# Altium PCB board.PcbDoc (part 1 of 2)
Units mm, origin at the board's own origin, x right, y up, seen from the top; angles counter-clockwise.
Board outline 123 x 60 mm, 4 copper layers (Top Layer, Mid Layer 1, Mid Layer 2, Bottom Layer), stack 1.17 mm thick; 104 components, 66 nets, 349 pads, 110 vias.
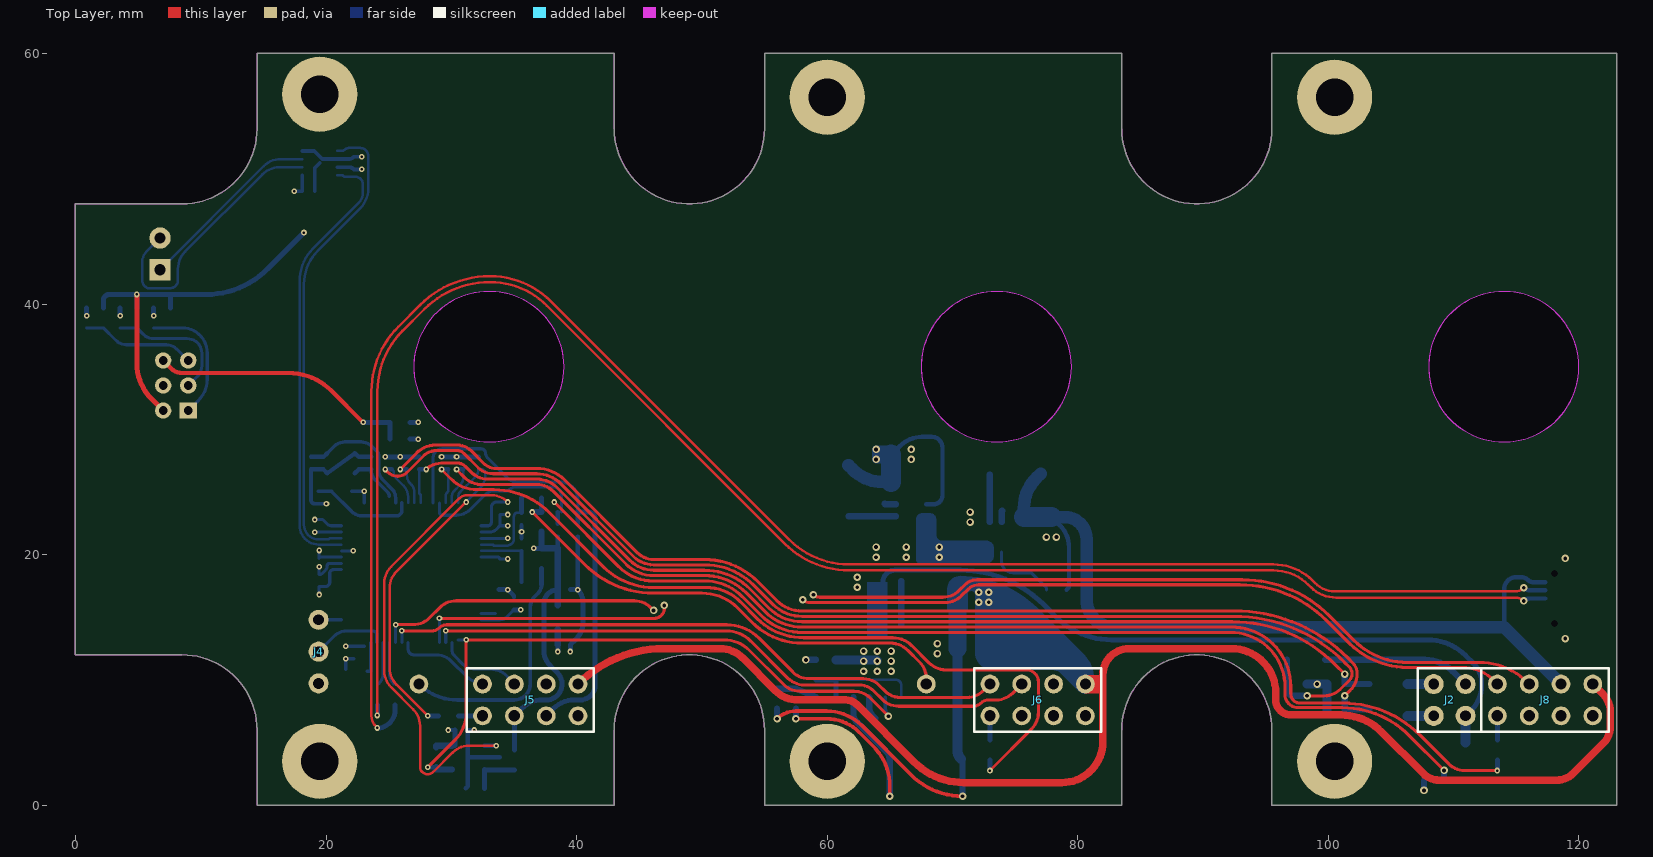
[diagram p0: Top Layer view]
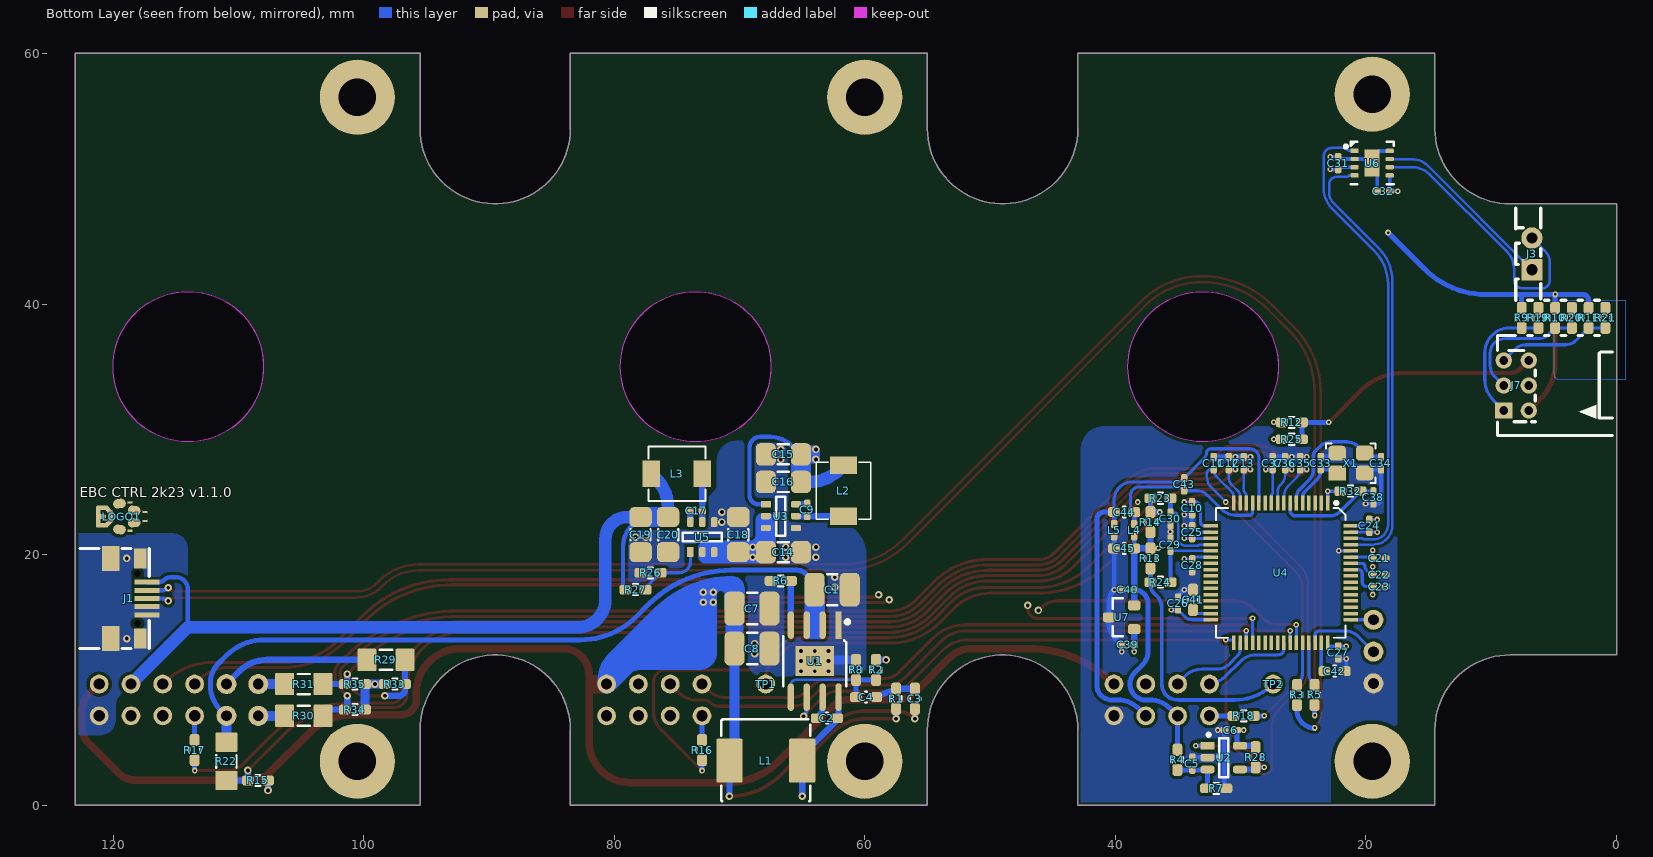
[diagram p1: Bottom Layer view, seen from below]
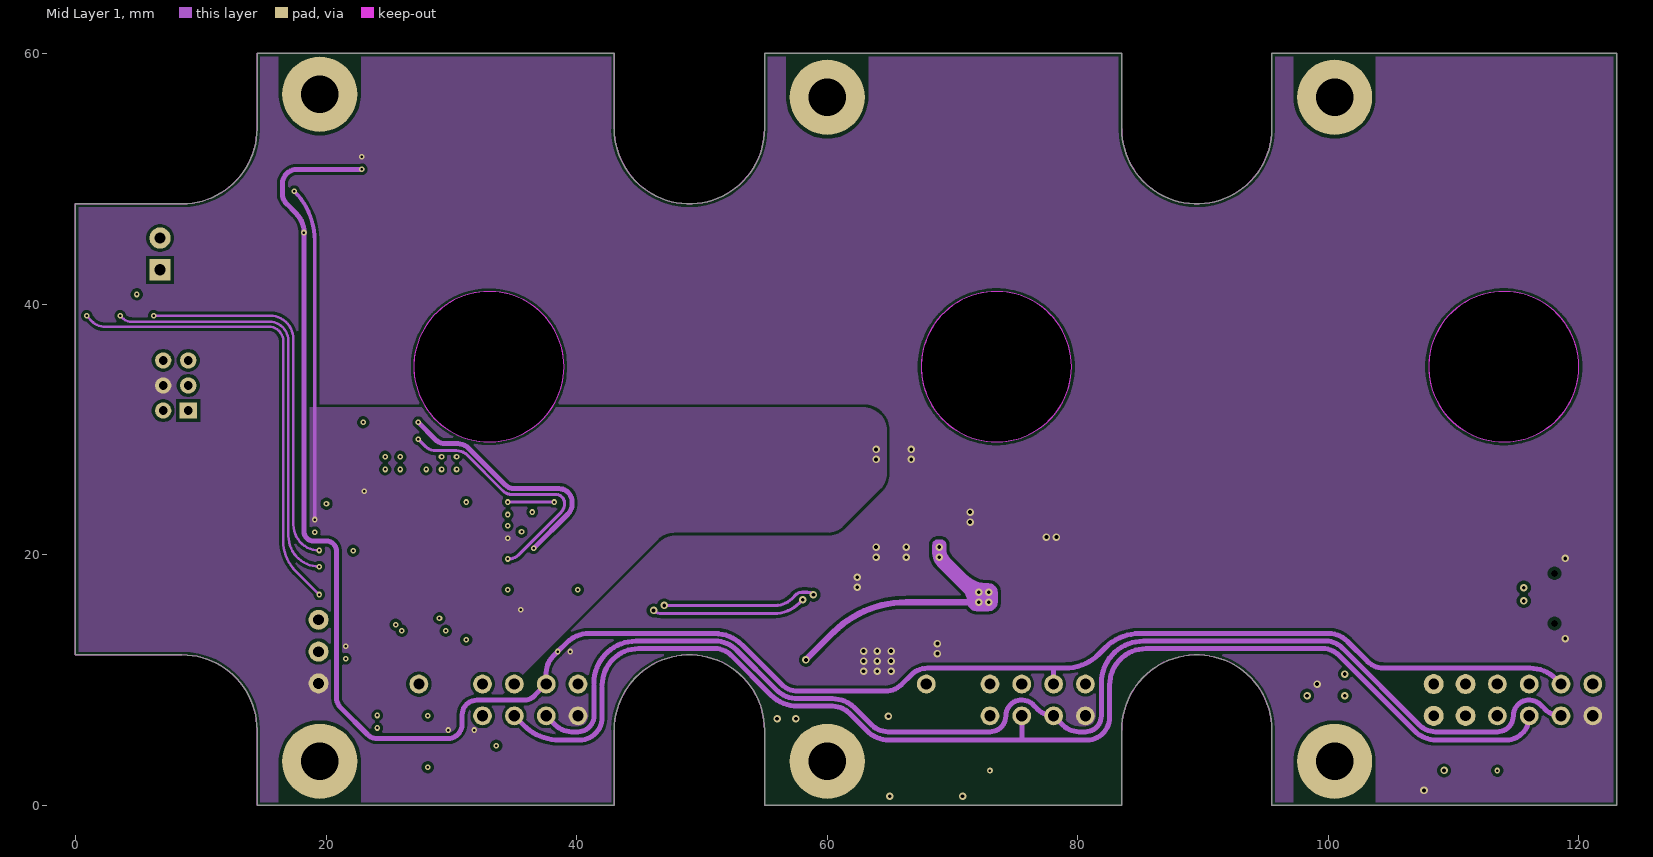
[diagram p2: Mid Layer 1]
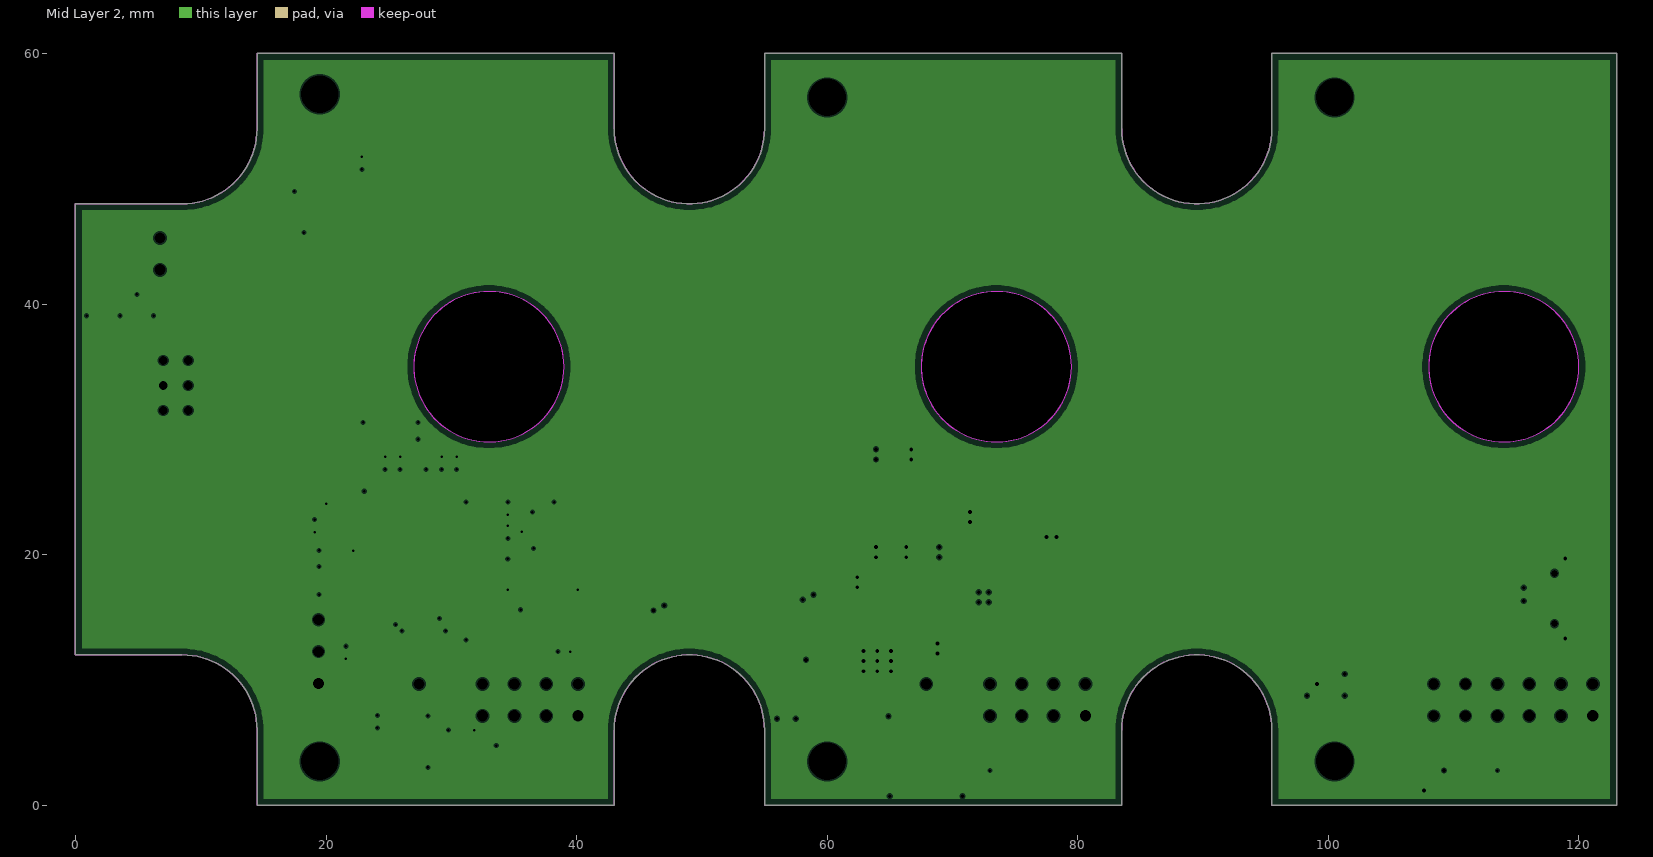
[diagram p3: Mid Layer 2, clearances drawn from the general rule]
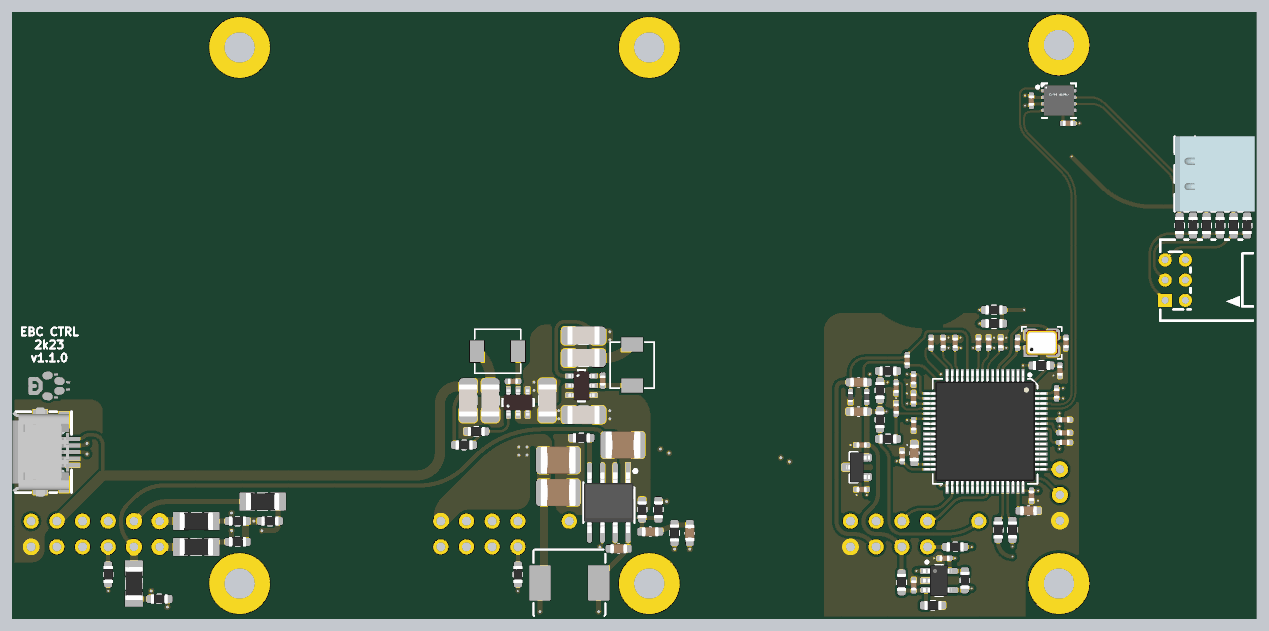
[diagram p5: 3D render of the assembled board from below, using the file's embedded part models]

## Layer stack, top to bottom
Top Solder: solder mask 0.0127, Solder Resist, Dk 3.8
Top Layer: signal copper 0.035
Dielectric 1: prepreg 0.1, 2313, Dk 4.05
Mid Layer 1: signal copper 0.0175
Core: core 0.865, FR-4, Dk 4.5
Mid Layer 2: plane copper 0.0175, net GND
Dielectric 2: prepreg 0.1, 2313, Dk 4.05
Bottom Layer: signal copper 0.035
Bottom Solder: solder mask 0.0127, Solder Resist, Dk 3.8

## Board outline
14.5,6 ccw(c8.5,6) 8.5,12 0,12 0,48 8.5,48 ccw(c8.5,54) 14.5,54 14.5,60 43,60 43,54 ccw(c49,54) 55,54 55,60 83.5,60 83.5,54 ccw(c89.5,54) 95.5,54 95.5,60 123,60 123,0 95.5,0 95.5,6 ccw(c89.5,6) 83.5,6 83.5,0 55,0 55,6 ccw(c49,6) 43,6 43,0 14.5,0
cut-out: 114,41 ccw(c114,35) 108,35 ccw(c114,35) 114,29 ccw(c114,35) 120,35 ccw(c114,35)
cut-out: 73.5,41 ccw(c73.5,35) 67.5,35 ccw(c73.5,35) 73.5,29 ccw(c73.5,35) 79.5,35 ccw(c73.5,35)
cut-out: 33,41 ccw(c33,35) 27,35 ccw(c33,35) 33,29 ccw(c33,35) 39,35 ccw(c33,35)

## Design rules (kind name [scope] priority, off if disabled: settings)
BoardOutlineClearance [All] p1: gap=0.2 ignorepadtopadclearanceinfootprint=FALSE
Clearance [All] p1: gap=0.25 ignorepadtopadclearanceinfootprint=FALSE except(0.102: Arc-Arc Arc-Track Arc-SMDPad Arc-THPad Arc-Text Track-Track Track-SMDPad Track-THPad Track-Text SMDPad-SMDPad SMDPad-THPad SMDPad-Text THPad-THPad THPad-Text Fill-Text Poly-Text Region-Text Text-Text; 0.127: Arc-Via Track-Via SMDPad-Via THPad-Via Via-Via Via-Text)
ComponentClearance [HasFootprint('SWD') or HasFootprint('HDR-2X2')] p1: gap=-1 collisioncheckmode=3 verticalgap=2540 showdistances=TRUE
ComponentClearance ComponentClearance_1 [All] p2: gap=0.4 collisioncheckmode=3 verticalgap=0.102 showdistances=TRUE
DiffPairsRouting [All] p1: maxlimit=0.102 minlimit=0.102 mostfreqgap=0.102 toplayer_minwidth=0.102 toplayer_maxwidth=1816.048 toplayer_prefwidth=0.102 midlayer1_minwidth=0.102 midlayer1_maxwidth=1816.048 midlayer1_prefwidth=0.102 bottomlayer_minwidth=0.102 bottomlayer_maxwidth=1816.048 bottomlayer_prefwidth=0.102 maxuncoupledlength=12.7
Height [All] p1: minheight=0 maxheight=1816.048 prefheight=12.7
HoleSize [All] p1: absolutevalues=TRUE maxlimit=6.3 minlimit=0.2 maxpercent=80.000 minpercent=20.000
HoleToHoleClearance [All] p1: gap=0.25 allowstackedmicrovias=FALSE
MinimumAnnularRing [All] p1: minimumring=0.076
MinimumSolderMaskSliver [All] p1: minsoldermaskwidth=0
PlaneClearance [All] p1: clearance=0.102
PlaneConnect PlaneConnectPowerPads [InPadClass('PowerPads')] p1: planeconnectstyle=Direct reliefexpansion=0.508 reliefentries=4 reliefconductorwidth=0.254 reliefairgap=0.254
PlaneConnect [All] p2: planeconnectstyle=Direct reliefexpansion=0.3 reliefentries=4 reliefconductorwidth=0.102 reliefairgap=0.102
PolygonConnect PolygonConnectPowerPads [All vs (InPadClass('PowerPads'))] p1: connectstyle=Direct reliefconductorwidth=0.254 reliefentries=4 polygonreliefangle="90 Angle" airgapwidth=0.254
PolygonConnect [All] p2: connectstyle=Direct reliefconductorwidth=0.102 reliefentries=4 polygonreliefangle="90 Angle" airgapwidth=0.102
RoutingVias [All] p1: holewidth=0.2 width=0.45 viastyle="Through Hole" minholewidth=0.2 minwidth=0.45 maxholewidth=6.3 maxwidth=6.55
SilkToSilkClearance [All] p1: silktosilkclearance=0
SilkToSolderMaskClearance [IsPad] p1: minsilkscreentomaskgap=0.102 clearancetoexposedcopper=TRUE
SolderMaskExpansion [All] p1: expansion=0.075 istentingtop=FALSE
Width [All] p1: maxlimit=1816.048 minlimit=0.102 preferedwidth=0.102
20 further rules are at their usual default settings.

## Classes and differential pairs
net class C30_Nets: GND NetC30_2
net class R35_Nets: GND NetC37_1
net class R34_Nets: GND NetC36_1
net class R33_Nets: GND NetC35_1
net class R32_Nets: 3V3 NetC38_2
net class R31_Nets: NetC37_1 W
net class R30_Nets: NetC36_1 V
net class R29_Nets: NetC35_1 U
net class R20_Nets: HALL_2 NetC22_1
net class R15_Nets: GND VB_SNS
net class R14_Nets: 3V3_REF NetR14_1
net class R13_Nets: 3V3_REF NetR13_1
net class R12_Nets: 3V3_REF TEMP_MTR
net class C44_Nets: AGND NetC43_2
net class C43_Nets: AGND NetC43_2
net class C42_Nets: GND NetC42_2
net class C41_Nets: GND NetC41_2
net class C35_Nets: GND NetC35_1
net class C28_Nets: GND NetC28_2
net class C23_Nets: GND NetC23_1
net class C22_Nets: GND NetC22_1
net class J7_Nets: 5V GND HALL_1 HALL_2 HALL_3 NetJ7_2 TEMP_MTR
net class J3_Nets: NetJ3_1 NetJ3_2
net class C34_Nets: GND NetC34_2
net class C29_Nets: GND NetC29_2
net class R27_Nets: 5V NetR26_1
net class C33_Nets: GND NetC33_2
net class R25_Nets: NetC28_2 TEMP_MTR
net class C37_Nets: GND NetC37_1
net class U5_Nets: 15V GND NetC17_1 NetC17_2 NetR26_1
net class U3_Nets: 3V3 15V GND NetC9_1 NetC9_2
net class R17_Nets: NetC12_1 W_Iout
net class R10_Nets: 5V HALL_2
net class R9_Nets: 5V HALL_1
net class R4_Nets: 3V3_REF NetC5_2
net class R2_Nets: 15V NetC4_1
net class L4_Nets: 3V3_REF NetC43_2
net class L3_Nets: 5V NetC17_2
net class C40_Nets: 3V3_REF GND
net class C38_Nets: GND NetC38_2
net class C45_Nets: 3V3_REF GND
net class C27_Nets: 3V3 GND
net class C13_Nets: GND NetC13_1
net class C12_Nets: GND NetC12_1
net class C11_Nets: GND NetC11_1
net class C6_Nets: 3V3 GND
net class C5_Nets: GND NetC5_2
net class TP1_Nets: NetR14_1
net class C36_Nets: GND NetC36_1
net class C21_Nets: GND NetC21_1
net class R8_Nets: GND NetC4_1
net class C31_Nets: 5V GND
net class C26_Nets: 3V3 GND
net class C14_Nets: 15V GND
net class C10_Nets: GND VB_SNS
net class C4_Nets: NetC3_1 NetC4_1
net class J2_Nets: NetJ?_1 NetJ?_2 NetJ?_3 NetJ?_4 U V Vb W
net class U1_Nets: BREAK GND NetC2_1 NetC2_2 NetC4_1 NetR6_1 Vb
net class R24_Nets: NetC29_2 NetR13_1
net class R1_Nets: NetC2_2 NetC3_1
net class L2_Nets: 3V3 NetC9_2
net class J1_Nets: 5V GND NetJ1_2 NetJ1_3
net class R26_Nets: GND NetR26_1
net class C32_Nets: 3V3 GND
net class C9_Nets: NetC9_1 NetC9_2
net class C1_Nets: GND Vb
net class U2_Nets: 3V3 BREAK GND NetC5_2 VB_SNS
net class TP2_Nets: NetR13_1
net class R21_Nets: HALL_3 NetC23_1
net class R19_Nets: HALL_1 NetC21_1
net class R18_Nets: NetC11_1 U_Iout
net class R28_Nets: 3V3 BREAK
net class R16_Nets: NetC13_1 V_Iout
net class R22_Nets: Vb VB_SNS
net class R23_Nets: NetC30_2 NetR14_1
net class R11_Nets: 5V HALL_3
net class R7_Nets: GND NetC5_2
net class R5_Nets: DP NetJ1_3
net class R3_Nets: DM NetJ1_2
net class L5_Nets: AGND GND
net class L1_Nets: 15V NetC2_2
net class C15_Nets: 3V3 GND
net class C20_Nets: 5V GND
net class C25_Nets: 3V3 GND
net class C17_Nets: NetC17_1 NetC17_2
net class C16_Nets: 3V3 GND
net class C7_Nets: 15V GND
net class C8_Nets: 15V GND
net class U7_Nets: 3V3_REF 5V GND
net class U6_Nets: 3V3 5V CAN_RX CAN_TX GND NetJ3_1 NetJ3_2
net class C18_Nets: 15V GND
net class C39_Nets: 5V GND
net class X1_Nets: GND NetC33_2 NetC34_2
net class U4_Nets: 3V3 AGND BREAK CAN_RX CAN_TX DM DP GND NetC11_1 NetC12_1 NetC13_1 NetC21_1 NetC22_1 NetC23_1 NetC28_2 NetC29_2 NetC30_2 NetC33_2 NetC34_2 NetC35_1 NetC36_1 NetC37_1 NetC38_2 NetC41_2 NetC42_2 NetC43_2 NetU1_2 NetU1_3 NetU1_4 NetU1_7 NetU1_8 NetU1_9 NetU1_10 NetU1_11 NetU1_12 NetU1_13 NetU1_14 NetU1_15 NetU1_16 NetU1_17 NetU1_20 NetU1_21 NetU1_22 NetU1_23 NetU1_24 NetU1_25 NetU1_26 NetU1_27 NetU1_28 NetU1_29 NetU1_30 NetU1_33 NetU1_34 NetU1_35 NetU1_36 NetU1_37 NetU1_38 NetU1_39 NetU1_40 NetU1_44 NetU1_45 NetU1_46 NetU1_49 NetU1_50 NetU1_51 NetU1_52 NetU1_53 NetU1_54 NetU1_55 NetU1_56 NetU1_57 NetU1_58 NetU1_59 NetU1_61 NetU1_62 SWCLK SWDIO U_H U_L V_H V_L VB_SNS W_H W_L
net class J4_Nets: GND SWCLK SWDIO
net class C24_Nets: 3V3 GND
net class R6_Nets: GND NetR6_1
net class C3_Nets: 15V NetC3_1
net class C2_Nets: NetC2_1 NetC2_2
net class C19_Nets: 5V GND
net class J8_Nets: 3V3_REF 5V 15V AGND GND W_H W_Iout W_L
net class J6_Nets: 3V3_REF 5V 15V AGND GND V_H V_Iout V_L
net class J5_Nets: 3V3_REF 5V 15V AGND GND U_H U_Iout U_L

## Components (designator, comment, footprint, x,y, rotation, side; value= is the part's Value field where it differs from the comment)
C1 "2u2" C1210 62.6,17.2 r0 bottom
C2 "2.2nF" C0603 63.025,6.944 r180 bottom
C3 "2n2" C0603 56,8.5 r270 bottom
C4 "56pF" C0603 59.9,8.625 r180 bottom
C5 "100nF" C0402 33.85,3.325 r270 bottom
C6 "100nF" C0402 30.8,6 r180 bottom
C7 "22u" C1210 69,15.7 r0 bottom
C8 "22u" C1210 69,12.5 r0 bottom
C9 "100nF" C0402 64.6,23.572 r270 bottom
C10 "100pF" C0402 33.875,23.7 r270 bottom
C11 "100pF" C0402 32.151,27.3 r90 bottom
C12 "100pF" C0402 30.951,27.3 r90 bottom
C13 "100pF" C0402 29.751,27.3 r90 bottom
C14 "10uF" C1206 66.5,20.2 r0 bottom
C15 "10uF" C1206 66.5,28 r180 bottom
C16 "10uF" C1206 66.5,25.8 r180 bottom
C17 "100nF" C0402 73.472,23.5 r180 bottom
C18 "10uF" C1206 70.1,21.6 r270 bottom
C19 "10uF" C1206 77.9,21.6 r90 bottom
C20 "10uF" C1206 75.7,21.6 r90 bottom
C21 "4n7" C0402 18.948,19.699 r180 bottom
C22 "4n7" C0402 18.948,18.411 r180 bottom
C23 "4n7" C0402 18.948,17.45 r180 bottom
C24 "100nF" C0402 19.726,22.3 r90 bottom
C25 "100nF" C0402 33.875,21.8 r270 bottom
C26 "100nF" C0402 35,16.1 r270 bottom
C27 "100nF" C0402 22.21,12.188 r90 bottom
C28 "100nF" C0402 33.866,19.152 r90 bottom
C29 "100nF" C0402 35.6,20.8 r270 bottom
C30 "100nF" C0402 35.6,22.86 r90 bottom
C31 "100nF" C0402 22.221,51.25 r270 bottom
C32 "100nF" C0402 18.6,49 r180 bottom
C33 "18pF" C0402 23.6,27.3 r270 bottom
C34 "18pF" C0402 18.8,27.3 r90 bottom
C35 "100pF" C0402 25.25,27.3 r90 bottom
C36 "100pF" C0402 26.45,27.3 r90 bottom
C37 "100pF" C0402 27.45,27.3 r90 bottom
C38 "100nF" C0402 19.4,24.561 r90 bottom
C39 "100nF" C0402 39,12.8 r180 bottom
C40 "100nF" C0402 39,17.2 r180 bottom
C41 "2.2uF" C0603 33.8,16.4 r270 bottom
C42 "2.2uF" C0603 22.5,10.7 r0 bottom
C43 "100nF" C0402 34.51,25.6 r270 bottom
C44 "1uF" C0603 39.3,23.4 r180 bottom
C45 "1uF" C0603 39.3,20.5 r180 bottom
J1 "MICROQTJ" MICRO-USB-SMD_MICROQTJ 118.75,16.5 r270 bottom
J2 "HDR2X2" HDR-2X2 109.68,8.4 r0 top
J3 "CAN" CONN-TH_22-05-7025 6.75,44 r270 bottom
J4 "SWD" SWD 19.4,12.26 r0 top
J5 "2x4" HDR-2X4 36.3,8.4 r90 top locked
J6 "2x4" HDR-2X4 76.8,8.4 r90 top locked
J7 "2x4" CONN-TH_6P-P2.00_XKB-CONNECTIVITY_X2026WR-2X03B-N0SN 8,33.5 r90 bottom
J8 "2x4" HDR-2X4 117.3,8.4 r90 top locked
L1 "68uH" L0605-POWER 67.9,3.56 r180 bottom
L2 "4.7uH" IND-SMD_L4.4-W4.2 61.7,25.1 r270 bottom
L3 "4.7uH" IND-SMD_L4.4-W4.2 75,26.45 r180 bottom
L4 "BEAD" L0402 38.5,21.95 r90 bottom
L5 "BEAD" L0402 40.1,21.95 r90 bottom
LOGO1 "LOGO" LOGO 121.189,23.038 r270 bottom
R1 "470k" R0603 57.5,8.5 r90 bottom
R2 "560k" R0603 59.1,10.8 r270 bottom
R3 "22R" R0603 25.501,8.8 r270 bottom
R4 "1k6" R0603 35.05,3.625 r270 bottom
R5 "22R" R0603 24.1,8.8 r270 bottom
R6 "100k" R0603 66.705,17.9 r0 bottom
R7 "1k6" R0603 31.95,1.35 r180 bottom
R8 "51k" R0603 60.7,10.8 r90 bottom
R9 "4k7" R0603 7.569,38.9 r90 bottom
R10 "4k7" R0603 4.897,38.9 r90 bottom
R11 "4k7" R0603 2.225,38.9 r90 bottom
R12 "10k" R0603 25.915,30.556 r0 bottom
R13 "10k" R0603 37.2,19.7 r90 bottom
R14 "10k" R0603 37.2,22.6 r270 bottom
R15 "1k6" R0603 108.434,1.976 r180 bottom
R16 "4k7" R0603 72.99,4.4 r270 bottom
R17 "4k7" R0603 113.49,4.4 r270 bottom
R18 "4k7" R0603 29.76,7.13 r180 bottom
R19 "10k" R0603 6.233,38.9 r270 bottom
R20 "10k" R0603 3.561,38.9 r270 bottom
R21 "10k" R0603 0.889,38.9 r270 bottom
R22 "47k" R1206 110.95,3.5 r270 bottom
R23 "10k" R0603 36.4,24.5 r0 bottom
R24 "10k" R0603 36.4,17.8 r0 bottom
R25 "10k" R0603 25.915,29.21 r180 bottom
R26 "4k7" R0603 77.1,18.55 r0 bottom
R27 "3k" R0603 78.3,17.2 r180 bottom
R28 "4k7" R0603 28.8,3.825 r90 bottom
R29 "47k" R1206 98.224,11.6 r0 bottom
R30 "47k" R1206 104.78,7.13 r0 bottom
R31 "47k" R1206 104.78,9.67 r0 bottom
R32 "4k7" R0603 21.225,25.061 r180 bottom
R33 "1k6" R0603 97.5,9.67 r0 bottom
R34 "1k6" R0603 100.7,7.63 r180 bottom
R35 "1k6" R0603 100.7,9.67 r180 bottom
TP1 "" TP2030_SMD 67.91,9.67 r90 bottom
TP2 "" TP2030_SMD 27.41,9.67 r90 bottom
U1 "LM5164" PowerSOIC-8 64,11.5 r0 bottom
U2 "LMV331TP" SOT-23-5 31.35,3.8 r0 bottom
U3 "AP63203WU-7" SOT-23-6 66.7,23.072 r0 bottom
U4 "STM32F405RGT6" LQFP-64 26.8,18.55 r270 bottom
U5 "AP63203WU-7" SOT-23-6 72.972,21.4 r270 bottom
U6 "SIT1042QTK/3" DFN8_3X3_P065 19.5,51.25 r180 bottom
U7 "NCP51460SN33T1G" SOT-23 39.5,15 r180 bottom
X1 "12MHZ" CRYSTAL_3.2x2.5mm 21.2,27.3 r180 bottom

## Footprints (in the part's own frame and the unit in brackets; to place one, negate y for a bottom-side part, rotate by r counter-clockwise, add the part's x,y. Pads: shape width x height; smd on the part's side, far side on the other; paste and mask are expansions set on the pad)
C0402 [mm] "Chip Capacitor Body"
  rrect50% 0.635x0.508 smd mask+0.05: 1(-0.5,0) 2(0.5,0)
  body extent -0.52,-0.27 0.53,0.28, height 0.55
C0603 [mil] "Chip Capacitor"
  rrect50% 38x31 smd mask+1.97: 1(-31.5,0) 2(31.5,0)
  silkscreen extent -3,-17 3,17, body extent -33,-18 33,18, height 35
C1206 [mm] "Chip Capacitor"
  rrect50% 1.6x1.8 smd: 1(-1.4,0) 2(1.4,0)
  silkscreen extent -0.45,-0.8 0.45,0.8, body extent -1.6,-0.88 1.6,0.92, height 1.6
C1210 [mm] "Chip Capacitor"
  rrect50% 1.6x2.7 smd mask+0.05: 1(-1.4,0) 2(1.4,0)
  silkscreen extent -0.4,-1.25 0.4,1.25, body extent -1.75,-1.35 1.75,1.35, height 1.8
CONN-TH_6P-P2.00_XKB-CONNECTIVITY_X2026WR-2X03B-N0SN [mm]
  rect 1.3x1.4 hole 0.7 paste-2539.97 mask+0.05: 1(-2,1)
  round 1.3 hole 0.7 paste-2539.97 mask+0.05: 2(-2,-1) 3(0,1) 4(0,-1) 5(2,1) 6(2,-1)
  silkscreen extent -4,-7.67 4,1.5, body extent -4,-8 4,1.5, height 5
CONN-TH_22-05-7025 [mm]
  rect 1.7x1.7 hole 0.9: 1(1.27,0)
  round 1.7 hole 0.9: 2(-1.27,0)
  silkscreen extent -3.67,-1.3 3.7,5.38, body extent -3.7,-1.3 3.7,6.6, height 4.95
CRYSTAL_3.2x2.5mm [mm]
  rect 1.4x1.2 smd mask+0.05: 1(-1.1,-0.8)
  rrect50% 1.4x1.2 smd mask+0.05: 2(-1.1,0.8) 3(1.1,0.8) 4(1.1,-0.8)
  silkscreen extent -1.97,-1.57 1.97,1.57, body extent -1.6,-1.25 1.6,1.25, height 0.82
DFN8_3X3_P065 [mm]
  rect 0.65x0.35 smd mask+0.05: 1(-1.4,0.975)
  rrect50% 0.65x0.35 smd mask+0.05: 2(-1.4,0.325) 3(-1.4,-0.325) 4(-1.4,-0.975) 5(1.4,-0.975) 6(1.4,-0.325) 7(1.4,0.325) 8(1.4,0.975)
  rect 1.2x2.15 smd mask+0.05: 9(0,0)
  silkscreen extent -2.23,-1.7 1.7,1.7, body extent -1.51,-1.5 1.51,1.5, height 0.8
HDR-2X2 [mm]
  round 1.6 hole 0.85: 1(-1.27,1.27) 2(1.27,1.27) 3(-1.27,-1.27) 4(1.27,-1.27)
  silkscreen extent -2.54,-2.54 2.54,2.54
HDR-2X4 [mm]
  round 1.5 hole 0.9: 1(-1.27,3.81) 2(1.27,3.81) 3(-1.27,1.27) 4(1.27,1.27) 5(-1.27,-1.27) 6(1.27,-1.27) 7(-1.27,-3.81) 8(1.27,-3.81)
  silkscreen extent -2.54,-5.08 2.54,5.08
IND-SMD_L4.4-W4.2 [mm]
  rect 1.4x2.12 smd: 1(2.028,0) 2(-2.028,0)
  silkscreen extent -2.28,-2.18 2.28,2.18, body extent -2.28,-2.18 2.28,2.18, height 1.8
L0402 [mm] "Chip Inductor"
  rrect50% 0.635x0.508 smd mask+0.05: 1(-0.5,0) 2(0.5,0)
  body extent -0.5,-0.25 0.5,0.25, height 0.5
L0605-POWER [mm]
  rrect10% 2.1x3.5 smd paste+0 mask+0.05: 1(2.9,0) 2(-2.9,0)
  Top Layer pour cut-out: -1.9,-3.122 -1.886,-3.19 -1.848,-3.248 -1.79,-3.286 -1.722,-3.3 -1.722,-3.3 1.722,-3.3 1.79,-3.286 1.848,-3.248 1.886,-3.19 1.9,-3.122 1.9,-3.122 1.9,3.122 1.886,3.19 1.848,3.248 1.79,3.286 1.722,3.3 1.722,3.3 -1.722,3.3 -1.79,3.286 -1.848,3.248 -1.886,3.19 -1.9,3.122 -1.9,3.122
  silkscreen extent -3.55,-3.26 3.55,3.3, body extent -3.55,-3.3 3.55,3.3, height 5
LOGO [mil]
  rect 15.75x7.87 smd rot 93 mask+4: ""(-44.55,100)
  oval 30x40 smd rot 8 mask+4: ""(-40.55,67)
  oval 15x39.5 smd mask+4: ""(-27.5,12.5) ""(27.5,12.5)
  oval 15x36.21 smd rot 135 mask+4: ""(-20,32.5)
  oval 30x40 smd rot 173 mask+4: ""(-18.99,113.27)
  rect 15.75x7.87 smd rot 83 mask+4: ""(-13.91,147.15)
  oval 70x15 smd mask+4: ""(0,0)
  oval 15x32.5 smd mask+4: ""(0,9)
  oval 39.5x15 smd mask+4: ""(0,40)
  rect 15.75x7.87 smd rot 97 mask+4: ""(13.91,147.15)
  oval 30x40 smd rot 7 mask+4: ""(18.99,113.27)
  oval 15x36.21 smd rot 45 mask+4: ""(20,32.5)
  oval 30x40 smd rot 172 mask+4: ""(40.55,67)
  rect 15.75x7.87 smd rot 87 mask+4: ""(44.55,100)
LQFP-64 [mil]
  rect 46x11 smd mask+0.98: 1(-219.5,147.64) 2(-219.5,127.95) 3(-219.5,108.27) 4(-219.5,88.58) 5(-219.5,68.9) 6(-219.5,49.21) 7(-219.5,29.53) 8(-219.5,9.84) 9(-219.5,-9.84) 10(-219.5,-29.53) 11(-219.5,-49.21) 12(-219.5,-68.9) 13(-219.5,-88.58) 14(-219.5,-108.27) 15(-219.5,-127.95) 16(-219.5,-147.64) 33(219.5,-147.64) 34(219.5,-127.95) 35(219.5,-108.27) 36(219.5,-88.58) 37(219.5,-68.9) 38(219.5,-49.21) 39(219.5,-29.53) 40(219.5,-9.84) 41(219.5,9.84) 42(219.5,29.53) 43(219.5,49.21) 44(219.5,68.9) 45(219.5,88.58) 46(219.5,108.27) 47(219.5,127.95) 48(219.5,147.64)
  rect 11x46 smd mask+0.98: 17(-147.64,-219.5) 18(-127.95,-219.5) 19(-108.27,-219.5) 20(-88.58,-219.5) 21(-68.9,-219.5) 22(-49.21,-219.5) 23(-29.53,-219.5) 24(-9.84,-219.5) 25(9.84,-219.5) 26(29.53,-219.5) 27(49.21,-219.5) 28(68.9,-219.5) 29(88.58,-219.5) 30(108.27,-219.5) 31(127.95,-219.5) 32(147.64,-219.5) 49(147.64,219.5) 50(127.95,219.5) 51(108.27,219.5) 52(88.58,219.5) 53(68.9,219.5) 54(49.21,219.5) 55(29.53,219.5) 56(9.84,219.5) 57(-9.84,219.5) 58(-29.53,219.5) 59(-49.21,219.5) 60(-68.9,219.5) 61(-88.58,219.5) 62(-108.27,219.5) 63(-127.95,219.5) 64(-147.64,219.5)
  silkscreen extent -224,-204 204,204, body extent -236,-236 236,236, height 59
MICRO-USB-SMD_MICROQTJ [mm]
  rect 0.4x2 smd mask+0.05: 1(-1.3,1.452) 2(-0.65,1.452) 3(0,1.452) 4(0.65,1.452) 5(1.3,1.452)
  rect 1.6x1 smd: 6(-3.2,0.902) 9(3.2,0.902)
  rect 2x1.4 smd: 7(-3.2,-1.452) 8(3.2,-1.452)
  round 0 hole 0.55 unplated: ""(-2,0.698) ""(2,0.698)
  silkscreen extent -4,-3.92 4,1.63, body extent -4.4,-4.2 4.4,1.4, height 2.72
PowerSOIC-8 [mm]
  rect 0.5x2.2 smd mask+0.05: 1(-1.905,-2.875)
  oval 0.5x2.2 smd mask+0.05: 2(-0.635,-2.875) 3(0.635,-2.875) 4(1.905,-2.875) 5(1.905,2.875) 6(0.635,2.875) 7(-0.635,2.875) 8(-1.905,2.875)
  rect 3.1x2.4 smd mask+0.05: 9(0,0)
  silkscreen extent -2.67,-3.17 2.52,2, body extent -2.45,-3 2.45,3, height 1.68
R0603 [mil] "Chip Resistor; Body 1.6 x 0.8 mm (LxW typ)"
  rrect50% 38x31 smd mask+1.97: 1(-31.5,0) 2(31.5,0)
  silkscreen extent -8,-17 8,17, body extent -33,-18 33,18, height 22
R1206 [mil] "Chip Resistor"
  rrect10% 60x70 smd mask+1.97: 1(-60,0) 2(60,0)
  silkscreen extent -20,-31 20,31, body extent -65,-33 65,33, height 26
SOT-23 [mm]
  rrect50% 1x0.8 smd mask+0.05: 1(1,-0.95) 2(1,0.95) 3(-1,0)
  silkscreen extent -0.7,-1.5 0.1,1.5, body extent -1.27,-1.5 1.33,1.5, height 1.1
SOT-23-5 [mm]
  rect 1.1x0.6 smd mask+0.05: 1(1.3,-0.95)
  rrect50% 1.1x0.6 smd mask+0.05: 2(1.3,0) 3(1.3,0.95) 4(-1.3,0.95) 5(-1.3,-0.95)
  silkscreen extent -0.35,-1.95 1.33,1.55, body extent -1.6,-1.55 1.6,1.55, height 1.45
SOT-23-6 [mm]
  rect 0.8x0.5 smd mask+0.05: 1(1.2,-0.95)
  rrect50% 0.8x0.5 smd mask+0.05: 2(1.2,0) 3(1.2,0.95) 4(-1.2,0.95) 5(-1.2,0) 6(-1.2,-0.95)
  silkscreen extent -0.35,-1.55 0.35,1.55, body extent -1.3,-1.45 1.3,1.45, height 1.14
SWD [mm]
  round 1.6 hole 0.85: 1(0,2.54) 2(0,0) 3(0,-2.54)
TP2030_SMD [mm] "TP30_SMD"
  round 1.5 hole 0.9 mask+0.05: 1(0,0)

## Part data
C1: library part CAP, "2.2uF 100V 1210"
C2 C41 C42: library part CAP, "2.2uF 0603"
C3: library part CAP, "2.2nF 0603"
C4: library part CAP, "56pF 0603"
C5 C6 C9 C10 C11 C12 C13 C17 C24 C25 C26 C27 C28 C29 C30 C31 C32 C35 C36 C37 C38 C39 C40 C43: library part CAP, "100nF 0402"
C7 C8: library part CAP, "22u 35V 1210"
C14 C15 C16 C18 C19 C20: library part CAP, "10uF 1206"
C21 C22 C23: library part CAP, "4n7 0402"
C33 C34: library part CAP, "18pF 0402"
C44 C45: library part CAP, "1uF 0603"
J2: library part "Header 2x2"
J3: library part "Header 3", "22057025"
J4: library part "Header 3"
J5 J6 J8: library part "Header 8"
J7: library part "Header 8", "X2026WR-2x03B-N0SN"
L1: library part SRN3015-100M, "PSPMAA0605H-680M-IGF"
L2 L3: "FXL0420-4R7-M"
L4 L5: library part BLM18AG601SN1D, "BEAD 0402"
R1: library part RES, "470k 0603"
R2: library part RES, "560k 0603"
R3 R5: library part RES, "22R 0603"
R4 R7 R15 R33 R34 R35: library part RES, "1k6 0603"
R6: library part RES, "100k 0603"
R8: library part RES, "51k 0603"
R9 R10 R11 R16 R17 R18 R26 R28 R32: library part RES, "4k7 0603"
R12 R13 R14 R19 R20 R21 R23 R24 R25: library part RES, "10k 0603"
R22 R29 R30 R31: library part RES, "47k 1206"
R27: library part RES, "3k 0603"
TP1 TP2: library part TP_Dup1
U4: library part STM32F405, "STM32 ARM-based 32-bit MCU"
U6: library part LTC2875
X1: library part "CRYSTAL 12MHZ 3.20mm x 2.50mm", "X322512MOB4SI"

## Free pads (board coordinates)
  round 6 hole 3: M(19.5,3.5) M(19.5,56.75) M(60,3.5) M(60,56.5) M(100.5,3.5) M(100.5,56.5)

## Via types
v1: diameter 0.45, hole 0.2, Top Layer to Bottom Layer, tented both sides, 59 vias
v2: diameter 0.6, hole 0.3, Top Layer to Bottom Layer, tented both sides, 51 vias

## Nets (pads, with @x,y where several pads share a name; then routed paths per layer and width w, separated by ;. In a path a pad name is that pad's centre, name@x,y a point inside that pad or via, vN(x,y) a via of type N, cw(c..) or ccw(c..) an arc to the next point about the centre after c; other vN are vias at no path point)
3V3: C6.2 C15.2 C16.2 C24.2 C25.2 C26.2 C27.2 C32.2 L2.2 R28.2 R32.1 U2.5 U3.1 U4.1 U4.19 U4.32 U4.48 U4.64 U6.5 | length 59.9
  Mid Layer 1 w0.3: v1(17.465,49) cw(c13.542,45.076) 19.091,45.076 v1(19.091,22.8)
  Bottom Layer w0.25: v1(19.091,22.8) C24.2@19.726,22.8 20.031,22.495 ccw(c20.5,22.963) 20.5,22.3 U4.64@21.225,22.3 ; v1(21.575,12.688) U4.48@23.045,12.688 ; R32.1@22.025,25.061 v1(23.05,25.061) U4.1@23.05,24.126 ; U4.32@32.376,14.8 33.889,14.8 ccw(c33.889,15.552) 34.421,15.02 C26.2@35,15.6 ; U4.19@32.376,21.3 C25.2@33.875,21.3 v1(34.51,21.3)
  Bottom Layer w0.3: v1(17.465,49) C32.2@18.1,49 U6.5@18.1,50.275
  Bottom Layer w0.35: v1(29.765,6) C6.2@30.3,6 ; C15.2@65.15,28 65.838,28.688 cw(c67.557,26.968) 67.557,29.4 68.338,29.4 cw(c68.338,28.538) 69.2,28.538 69.2,24.733 cw(c68.489,24.733) 68.489,24.022 U3.1@67.9,24.022
  Bottom Layer w0.4: U2.5@30.05,4.75 30.3,4.75 C6.2@30.3,6 ; C26.2@35,15.6 v1(35.535,15.6)
  Bottom Layer w0.5: R28.2@28.8,4.625 28.8,4.75 U2.5@30.05,4.75
  Bottom Layer w1: L2.2@61.7,27.128 62.047,26.781 ccw(c64.415,29.15) 64.415,25.8 C16.2@65.1,25.8 C16.2@65.15,25.8
  Bottom Layer w1.6: C16.2@65.1,25.8 C15.2@65.1,28
  other v2: 63.9,27.6 63.9,28.4
3V3_REF: C40.2 C45.2 J5.3 J6.3 J8.3 L4.1 R4.1 R12.2 R13.2 R14.2 U7.2 | length 146
  Mid Layer 1 w0.4: v1(27.35,30.556) 28.71,29.197 ccw(c29.536,30.023) 29.536,28.854 30.526,28.854 cw(c30.526,27.686) 31.352,28.512 34.305,25.56 ccw(c35.006,26.26) 35.006,25.269 38.589,25.269 cw(c38.589,24.229) 39.63,24.229 39.63,24.021 cw(c38.529,24.021) 39.307,23.242 v1(36.565,20.5) ; J5.3@35.03,7.13 35.785,6.375 ccw(c38.622,9.212) 38.622,5.2 40.22,5.2 ccw(c40.22,7.02) 42.04,7.02 42.04,9.387 ; 42.04,9.587 cw(c44.953,9.587) 44.953,12.5 51.032,12.5 cw(c51.032,10.646) 52.343,11.957 55.505,8.795 ccw(c57.665,10.954) 57.665,7.9 60.44,7.9 cw(c60.44,6.046) 61.751,7.357 63.189,5.919 ccw(c64.925,7.654) 64.925,5.2 75.53,5.2 ; J6.3@75.53,7.13 75.53,5.2 ; 85.453,12.5 ccw(c85.453,9.587) 82.54,9.587 82.54,7.02 cw(c80.72,7.02) 80.72,5.2 75.53,5.2 ; 85.542,12.5 99.54,12.5 cw(c99.54,10.646) 100.851,11.957 106.889,5.919 ccw(c108.625,7.654) 108.625,5.2 114.176,5.2 ccw(c114.176,7.054) 116.03,7.054 J8.3@116.03,7.13
  Bottom Layer w0.35: C45.2@38.5,20.5 L4.1@38.5,21.45
  Bottom Layer w0.4: R12.2@26.715,30.556 v1(27.35,30.556) ; J5.3@35.03,7.13 35.605,7.705 cw(c37.283,6.027) 37.283,8.4 37.57,8.4 ccw(c37.57,9.67) 38.468,10.568 37.856,11.18 cw(c38.958,12.281) 37.4,12.281 37.4,16.1 cw(c38.5,16.1) C40.2@38.5,17.2 ; R4.1@35.05,4.425 J5.3@35.05,7.11 ; v1(36.565,20.5) R13.2@37.2,20.5
  Bottom Layer w0.5: R14.2@37.2,21.835 R13.2@37.2,20.5 C45.2@38.5,20.5 C40.2@38.5,17.2 U7.2@38.5,15.95
5V: C19.2 C20.2 C31.2 C39.2 J1.1 J5.6 J6.6 J7.2 J8.6 L3.2 R9.2 R10.2 R11.2 R27.1 U6.3 U7.1 | length 264
  Top Layer w0.4: v1(4.897,40.767) 4.897,35.26 ccw(c8.898,35.26) 6.069,32.431 J7.2@7,31.5
  Mid Layer 1 w0.4: v1(22.856,50.75) 17.678,50.75 ccw(c17.678,49.582) 16.51,49.582 16.51,48.82 ccw(c17.678,48.82) 16.852,47.994 17.601,47.245 cw(c16.064,45.709) v1(18.237,45.709) 18.237,21.844 ccw(c18.999,21.844) 18.999,21.082 20.022,21.082 cw(c20.022,20.276) 20.828,20.276 20.828,8.612 ccw(c21.996,8.612) 21.17,7.786 23.305,5.651 ccw(c24.131,6.477) 24.131,5.309 29.693,5.309 ccw(c29.693,6.477) 30.861,6.477 30.861,7.214 cw(c32.029,7.214) 32.029,8.382 35.798,8.382 ccw(c35.798,9.55) 36.624,8.724 J5.6@37.57,9.67 37.57,10.567 cw(c39.424,10.567) 38.113,11.878 v1(38.5,12.265) 39.199,12.965 cw(c40.975,11.189) 40.975,13.7 51.032,13.7 cw(c51.032,10.646) 53.192,12.805 56.354,9.643 ccw(c57.665,10.954) 57.665,9.1 64.632,9.1 ccw(c64.632,10.954) 65.943,9.643 66.697,10.397 cw(c68.008,9.086) 68.008,10.94 78.07,10.94 ; J6.6@78.07,9.67 78.07,10.94 ; J8.6@118.57,9.67 118.139,10.101 ccw(c116.108,8.062) 116.108,10.94 104.428,10.94 cw(c104.428,12.794) 103.117,11.483 101.531,13.069 ccw(c100.008,11.546) 100.008,13.7 84.9,13.7 ccw(c84.9,9.9) 82.213,12.587 81.693,12.067 cw(c78.972,14.788) 78.972,10.94 78.07,10.94
  Bottom Layer w0.3: U6.3@20.9,50.925 21.798,50.925 cw(c21.798,50.328) C31.2@22.221,50.75 v1(22.856,50.75)
  Bottom Layer w0.35: C19.2@77.9,23 78.588,22.312 cw(c76.868,20.593) 79.3,20.593 79.3,17.4 R27.1@79.1,17.2 ; 114.04,14.2 114.04,17.253 cw(c114.987,17.253) 114.987,18.2 115.417,18.2 cw(c115.417,17.517) 115.9,18 ccw(c116.382,18.482) 116.382,17.8 J1.1@117.298,17.8
  Bottom Layer w0.4: R11.2@2.225,39.7 2.225,40.274 cw(c2.718,40.274) 2.718,40.767 v1(4.897,40.767) ; R10.2@4.897,39.7 v1(4.897,40.767) ; R9.2@7.569,39.7 7.569,40.767 ; v1(18.237,45.709) 15.322,42.793 cw(c10.429,47.686) 10.429,40.767 7.569,40.767 ; v1(38.5,12.265) C39.2@38.5,12.8 ; v1(4.897,40.767) 7.569,40.767
  Bottom Layer w0.5: C39.2@38.5,12.8 U7.1@38.5,14.05
  Bottom Layer w1: C20.2@75.7,23 75.7,23.735 cw(c79.05,23.735) 76.681,26.103 L3.2@77.028,26.45 ; C19.2@77.9,23 78.953,23 cw(c78.953,21.254) 80.699,21.254 80.699,16.42 ccw(c82.919,16.42) 82.919,14.2 114.04,14.2 J8.6@118.57,9.67
  Bottom Layer w1.6: C20.2@75.7,23 C19.2@77.9,23
15V: C3.2 C7.2 C8.2 C14.2 C18.2 J5.8 J6.8 J8.8 L1.2 R2.1 U3.2 U3.3 U5.2 U5.3 | length 155.8
  Top Layer w0.3: v2(56,6.9) cw(c57.483,5.417) 57.483,7.514 59.956,7.514 cw(c59.956,3.541) 62.766,6.35 66.689,2.427 ccw(c70.8,6.538) v2(70.8,0.724)
  Top Layer w0.6: J5.8@40.11,9.67 cw(c46.942,2.838) 46.942,12.5 51.448,12.5 cw(c51.448,9.96) 53.244,11.756 55.856,9.144 ccw(c57.652,10.94) 57.652,8.4 61.495,8.4 cw(c61.495,7.181) 62.357,8.043 66.961,3.439 ccw(c70.917,7.395) 70.917,1.8 78.735,1.8 ccw(c78.735,5.065) 82,5.065 82,10.4 cw(c84.1,10.4) 84.1,12.5 92.267,12.5 cw(c92.267,8.967) 95.8,8.967 95.8,8.424 ccw(c97.019,8.424) 97.019,7.205 101.012,7.205 cw(c101.012,2.659) 104.226,5.874 107.557,2.543 ccw(c108.868,3.854) 108.868,2 118.232,2 ccw(c118.232,3.854) 119.543,2.543 121.957,4.957 ccw(c120.646,6.268) 122.5,6.268 122.5,7.482 ccw(c120.573,7.482) 121.936,8.844 J8.8@121.11,9.67
  Mid Layer 1 w0.5: v2(58.3,11.6) 60.492,13.792 cw(c66.305,7.979) 66.305,16.2 v2(72.1,16.2)
  Bottom Layer w0.5: v2(56,6.9) C3.2@56,7.7 ; v2(58.3,11.6) R2.1@59.1,11.6 ; v2(70.8,0.724) L1.2@70.8,3.56
  Bottom Layer w0.8: C8.2@70.4,12.5 70.4,4.371 ccw(c71.391,4.371) L1.2@70.69,3.67
  Bottom Layer w1.4: C8.2@70.4,12.5 C7.2@70.4,15.7
  other v2: 72.9,16.2 72.1,17 72.9,17 68.95,19.8 68.95,20.6
AGND: C43.1 C44.1 J5.5 J6.5 J8.5 L5.2 U4.12 | length 141
  Mid Layer 1 w0.4: J5.5@37.57,7.13 38.297,6.403 ccw(c39.608,7.714) 39.608,5.86 40.11,5.86 ccw(c40.11,7.13) 41.38,7.13 41.38,9.548 ; 41.38,9.748 cw(c44.732,9.748) 44.732,13.1 51.032,13.1 cw(c51.032,10.646) 52.767,12.381 55.93,9.219 ccw(c57.665,10.954) 57.665,8.5 60.44,8.5 cw(c60.44,6.046) 62.176,7.781 63.554,6.403 ccw(c64.865,7.714) 64.865,5.86 72.99,5.86 ccw(c72.99,7.13) 74.26,7.13 cw(c75.53,7.13) 76.428,8.028 76.8,7.656 ccw(c78.07,8.926) J6.5@78.07,7.13 78.797,6.403 ccw(c80.108,7.714) 80.108,5.86 80.61,5.86 ccw(c80.61,7.13) 81.88,7.13 81.88,9.748 cw(c85.232,9.748) 85.232,13.1 99.789,13.1 cw(c99.789,11.246) 101.1,12.557 107.254,6.403 ccw(c108.565,7.714) 108.565,5.86 113.49,5.86 ccw(c113.49,7.13) 114.76,7.13 cw(c116.03,7.13) 116.928,8.028 117.3,7.656 ccw(c118.57,8.926) J8.5@118.57,7.13
  Bottom Layer w0.25: U4.12@28.55,24.126 28.55,27.728 cw(c29.271,27.728) 29.271,28.448 32.36,28.448 cw(c32.36,28.067) 32.741,28.067 ccw(c33.218,28.067) 32.88,27.729 C43.1@34.51,26.1 ccw(c35.234,26.824) 35.234,25.8 38.658,25.8 cw(c38.658,24.357) 40.1,24.357 C44.1@40.1,23.4 C44.1@40.1,23.523
  Bottom Layer w0.35: L5.2@40.1,22.45 C44.1@40.1,23.4
  Bottom Layer w0.4: J5.5@37.57,7.13 38.145,7.705 cw(c39.823,6.027) 39.823,8.4 40.3,8.4 ccw(c40.3,9.58) 41.48,9.58 41.48,22.82 ccw(c40.9,22.82) 40.9,23.4 40.223,23.4 cw(c40.223,23.523) C44.1@40.1,23.523
BREAK: R28.1 U1.6 U2.4 U4.33 | length 51.6
  Top Layer w0.25: v1(28.125,3.025) 30.282,5.182 ccw(c28.115,7.348) 31.179,7.348 v1(31.179,13.2) 51.749,13.2 cw(c51.749,10.297) 53.802,12.35 56.508,9.643 ccw(c57.82,10.954) 57.82,9.1 62.119,9.1 cw(c62.119,7.246) 63.43,8.557 v2(64.889,7.098)
  Bottom Layer w0.25: U4.33@30.55,13.2 v1(31.179,13.2)
  Bottom Layer w0.3: U1.6@64.635,8.625 64.635,7.711 ccw(c65.502,7.711) v2(64.889,7.098)
  Bottom Layer w0.35: v1(28.125,3.025) R28.1@28.8,3.025
  Bottom Layer w0.5: R28.1@28.8,3.025 28.8,2.85 U2.4@30.05,2.85
CAN_RX: U4.61 U6.4 | length 35.7
  Bottom Layer w0.2: U6.4@20.9,50.275 21.249,50.275 cw(c21.249,50.064) 21.399,50.213 ccw(c21.551,50.365) 21.551,50.15 22.367,50.15 cw(c22.367,49.581) 22.936,49.581 22.936,48.896 cw(c21.768,48.896) 22.594,48.07 18.987,44.463 ccw(c21.654,41.795) 17.882,41.795 17.882,22.343 ccw(c19.424,22.343) 19.424,20.8 U4.61@21.225,20.8